# Altium PCB Gain.PcbDoc
Units mm, origin at the board's own origin, x right, y up, seen from the top; angles counter-clockwise.
Board outline 39 x 62.03 mm, 2 copper layers (Top Layer, Bottom Layer); 28 components, 16 nets, 90 pads, 13 vias.
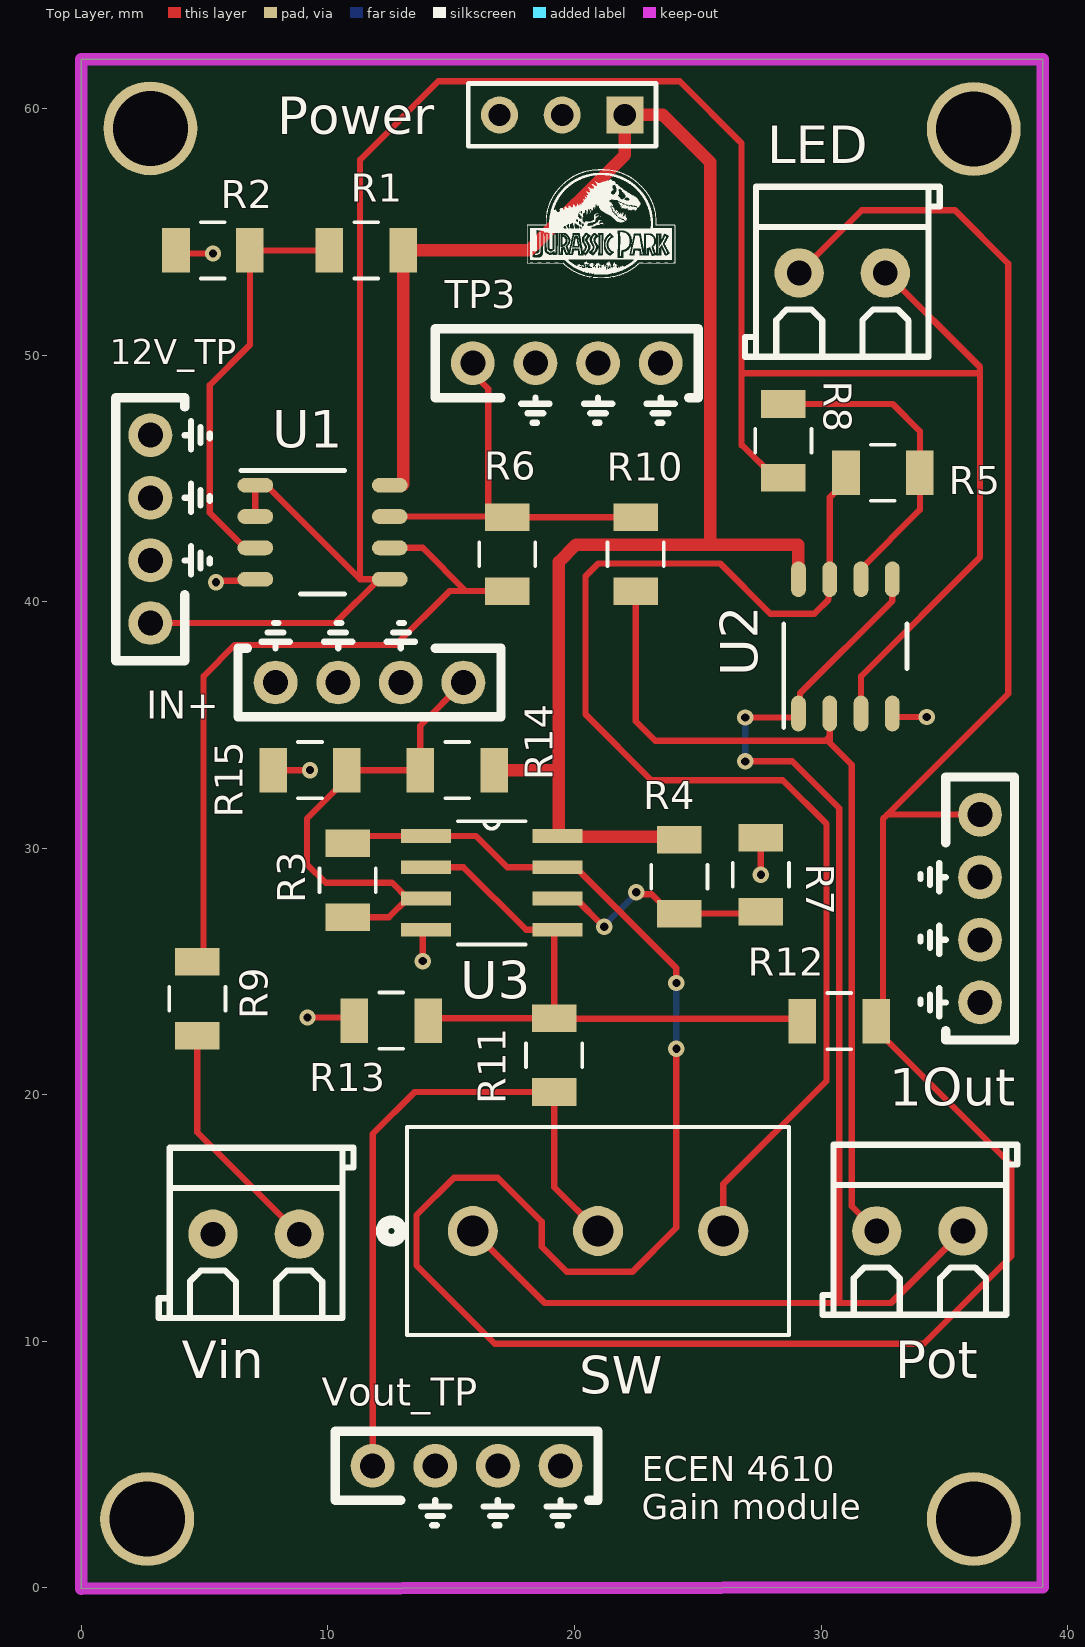
[diagram p0: Top Layer view]
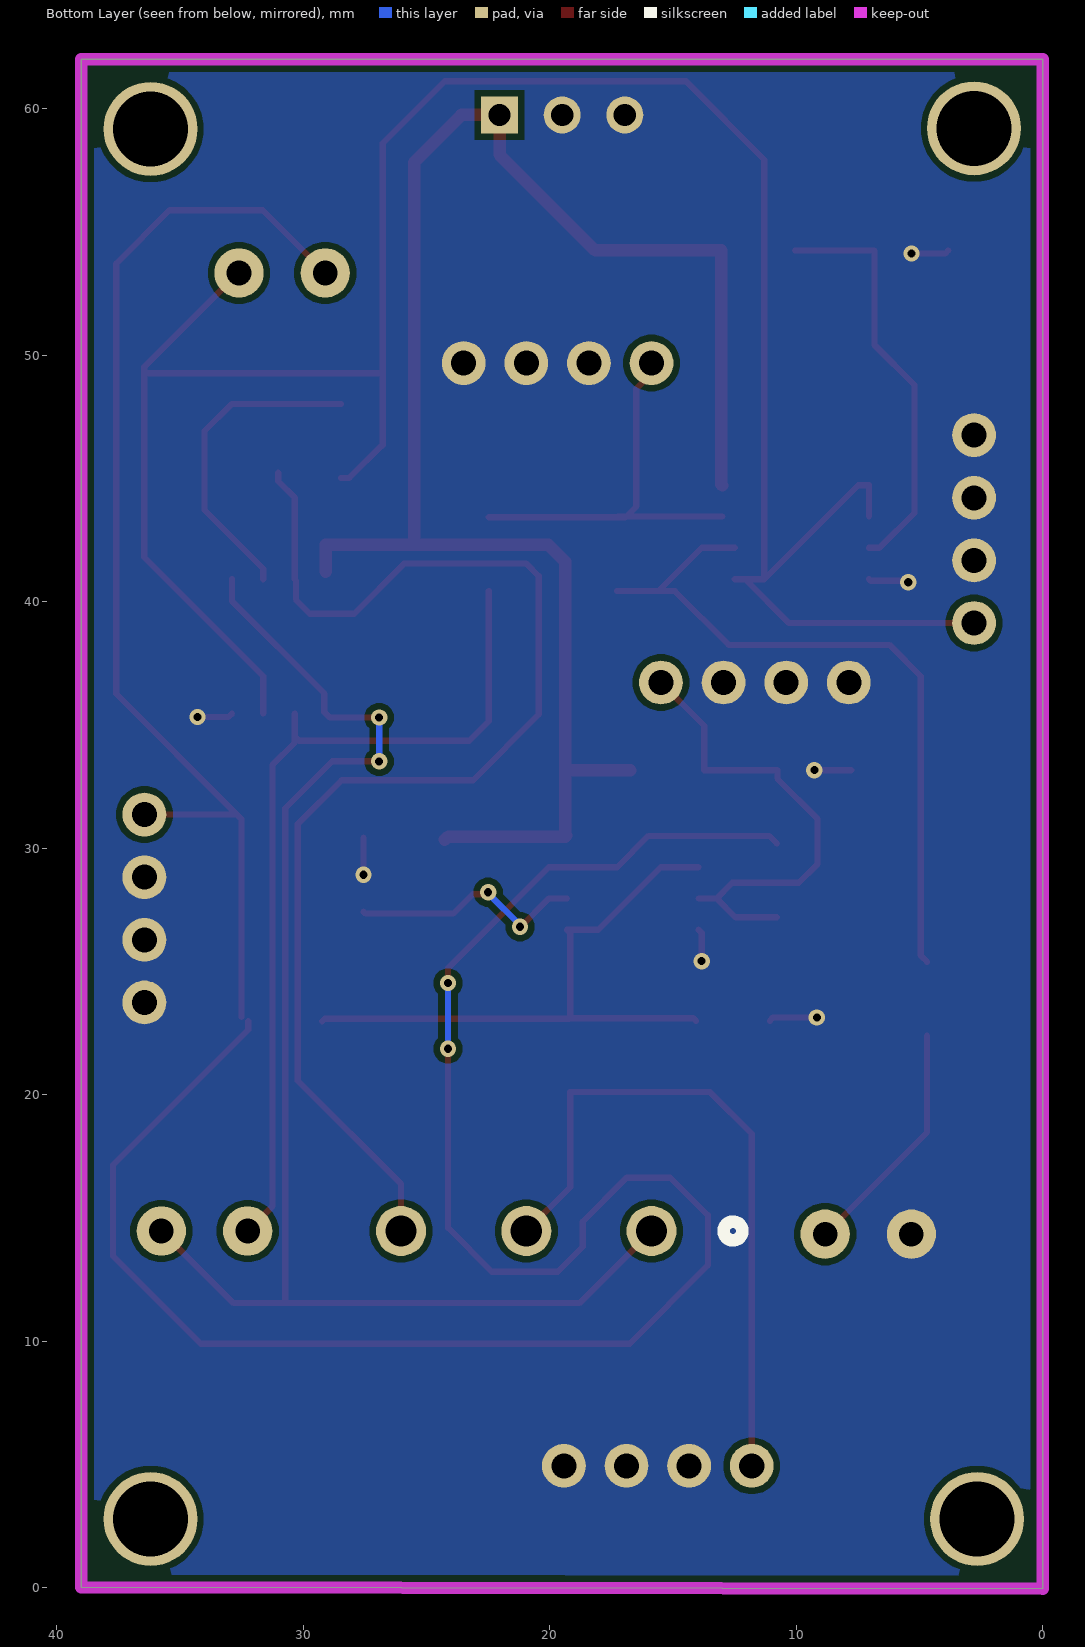
[diagram p1: Bottom Layer view, seen from below]
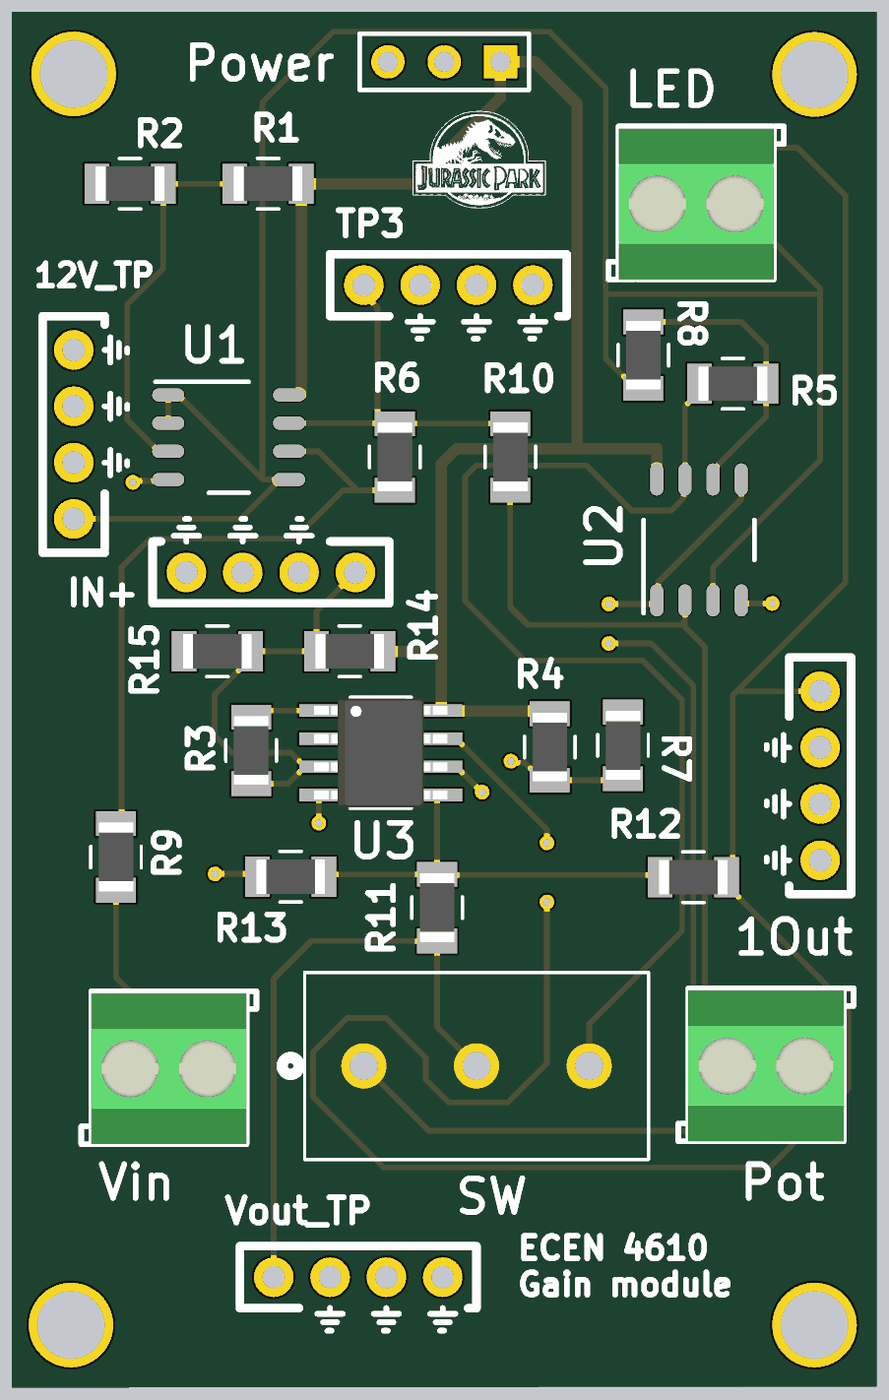
[diagram p2: 3D render of the assembled board from above, using the file's embedded part models]

## Layer stack, top to bottom
Top Solder: solder mask 0.0102, Solder Resist, Dk 3.5
Top Layer: signal copper 0.0356
Dielectric 1: dielectric 0.32, FR-4, Dk 4.8
Bottom Layer: signal copper 0.0356
Bottom Solder: solder mask 0.0102, Solder Resist, Dk 3.5

## Board outline
39,62 39,0.021 0,-0.026 0,62

## Design rules (kind name [scope] priority, off if disabled: settings)
Clearance [All] p1: gap=0.254 ignorepadtopadclearanceinfootprint=FALSE
PlaneConnect [All] p1: planeconnectstyle=Direct reliefexpansion=0.508 reliefentries=4 reliefconductorwidth=0.254 reliefairgap=0.254
PolygonConnect [All] p1: connectstyle=Direct reliefconductorwidth=0.254 reliefentries=4 polygonreliefangle="90 Angle" airgapwidth=0.254
RoutingVias [All] p1: holewidth=0.711 width=1.27 viastyle="Through Hole" minholewidth=0.711 minwidth=1.27 maxholewidth=0.711 maxwidth=1.27
SolderMaskExpansion [All] p1: expansion=0.102 istentingtop=FALSE
SupplyNets "Schematic Supply Nets_2" [InNet('+12')] p1: voltage=0.000
SupplyNets "Schematic Supply Nets_1" [InNet('GND')] p2: voltage=0.000
SupplyNets "Schematic Supply Nets" [InNet('+24')] p3: voltage=0.000
Width [All] p1: maxlimit=0.508 minlimit=0.254 preferedwidth=0.254
29 further rules are at their usual default settings.

## Components (designator, comment, footprint, x,y, rotation, side; value= is the part's Value field where it differs from the comment)
1Out "10x Probe TP" TP10x_Probe 36.449,27.559 r270 top (schematic designator TP4)
12V_TP "10x Probe TP" TP10x_Probe 2.794,42.95 r90 top (schematic designator TP1)
IN+ "10x Probe TP" TP10x_Probe 11.684,36.727 r180 top (schematic designator TP5)
LED "2P Screw Terminal Block" "P_Terminal block 3.5mm-pitch" 30.861,53.34 r0 top (schematic designator P4)
Pot "2P Screw Terminal Block" "P_Terminal block 3.5mm-pitch" 34.008,14.478 r0 top (schematic designator P2)
Power "Header 3" HDR1X3 22.04,59.75 r180 top (schematic designator P3)
R1 "10k" 1206_Passive_Resitor 11.557,54.253 r0 top value=10KOhm
R2 "10k" 1206_Passive_Resitor 5.334,54.253 r0 top value=10KOhm
R3 "300 Ohm" 1206_Passive_Resitor 10.795,28.701 r270 top value=330KOhm
R4 "1k" 1206_Passive_Resitor 24.257,28.853 r90 top value="1M Ohm"
R5 "90KOhm" 1206_Passive_Resitor 32.512,45.236 r180 top
R6 "100KOhm" 1206_Passive_Resitor 17.272,41.934 r90 top
R7 "1k" 1206_Passive_Resitor 27.559,28.931 r270 top value="10K Ohm"
R8 "100KOhm" 1206_Passive_Resitor 28.475,46.525 r90 top
R9 "100KOhm" 1206_Passive_Resitor 4.699,23.9 r90 top
R10 "10k" 1206_Passive_Resitor 22.479,41.934 r90 top value=10KOhm
R11 "1k" 1206_Passive_Resitor 19.177,21.614 r90 top value="1K Ohm"
R12 "300 Ohm" 1206_Passive_Resitor 30.734,22.987 r0 top value=330KOhm
R13 "1k" 1206_Passive_Resitor 12.573,23.011 r0 top value="1K Ohm"
R14 "1k" 1206_Passive_Resitor 15.24,33.171 r0 top value="52K Ohm"
R15 "1k" 1206_Passive_Resitor 9.271,33.171 r0 top value="50K Ohm"
SW "282837-3" 282837-3_TYC 15.875,14.478 r0 top (schematic designator U4)
TP3 "10x Probe TP" TP10x_Probe 19.685,49.681 r0 top
U1 "OPA2196IDR" D0008A_N 9.779,42.823 r0 top
U2 "OPA2196IDR" D0008A_N 30.988,38.193 r90 top
U3 "LM393DR" D8 16.637,28.599 r0 top
Vin "2P Screw Terminal Block" "P_Terminal block 3.5mm-pitch" 7.084,14.351 r0 top (schematic designator P1)
Vout_TP "10x Probe TP" TP10x_Probe 15.621,4.953 r0 top (schematic designator TP2)

## Footprints (in the part's own frame and the unit in brackets; to place one, negate y for a bottom-side part, rotate by r counter-clockwise, add the part's x,y. Pads: shape width x height; smd on the part's side, far side on the other; paste and mask are expansions set on the pad)
1206_Passive_Resitor [mil]
  rect 44x71 smd: 1(-59,0) 2(59,0)
  silkscreen extent -19,-45 19,45, body extent -61,-31 61,31, height 26
282837-3_TYC [mil]
  round 80 / inner round 60 / far side round 80 hole 50 paste-99999 mask+0: 1(0,0) 2(200,0) 3(400,0)
  silkscreen extent -145,-166 505,166
D8 [mil]
  rect 80x22 smd: 1(-105,75) 2(-105,25) 3(-105,-25) 4(-105,-75) 5(105,-75) 6(105,-25) 7(105,25) 8(105,75)
  silkscreen extent -54,-98 54,98, body extent -118,-96 118,96, height 69
D0008A_N [mm]
  oval 1.45x0.6 smd paste+0 mask+0.051: 1(-2.725,1.905) 2(-2.725,0.635) 3(-2.725,-0.635) 4(-2.725,-1.905) 5(2.725,-1.905) 6(2.725,-0.635) 7(2.725,0.635) 8(2.725,1.905)
  silkscreen extent -3.3,-2.5 0.9,2.5
HDR1X3 [mm] "Connector; Header; 3 Position"
  rect 1.5x1.5 hole 0.9: 1(0,0)
  round 1.5 hole 0.9: 2(2.54,0) 3(5.08,0)
  silkscreen extent -1.27,-1.27 6.35,1.27
"P_Terminal block 3.5mm-pitch" [mm]
  round 2 hole 1: 1(-1.75,0) 2(1.75,0)
  silkscreen extent -3.95,-3.4 3.95,3.5, body extent -3.5,-3.4 3.5,3.4, height 8.4
TP10x_Probe [mil] "Small Probs footprint"
  round 70 hole 40: 1(-150,0) 2(-50,0) 2(50,0) 2(150,0)
  silkscreen extent -210,-95 210,55

## Part data
1Out 12V_TP IN+ TP3 Vout_TP: library part TP_10x_Probe, "Test Point 300 mil centers"
LED Pot Vin: library part "P_Terminal block", "Green Straight pin 3.5mm  pitch; P=3.5mm  Screw terminal ROHS", LCSC Part#=C474892, Manufacturer="Cixi Kefa Elec", MFR Part #=KF350-3.5-2P, Datasheet=https://datasheet.lcsc.com/lcsc/2001160007_Cixi-Kefa-Elec-KF350-3-5-2P_C474892.pdf
Power: "Header, 3-Pin", LatestRevisionDate=17-Jul-2002, LatestRevisionNote="Re-released for DXP Platform.", Publisher="Altium Limited"
R1 R2 R10: library part R_10KOhm_1206, "10 kOhms ±5% 0.25W, 1/4W Chip Resistor 1206 (3216 Metric) Automotive AEC-Q200 Thick Film", LCSC Part#=C17902, MFR Part #=RMCF1206FT10K0, Digikey Link=https://www.digikey.com/en/products/detail/stackpole-electronics-inc/RMCF1206FT10K0/1759669, Type=Basic
R3 R12: library part R_300Ohm_1206, "CHIP RESISTOR - SURFACE MOUNT 300OHMS ±1% 1/4W 1206 ROHS", LCSC Part#=C17887, MFR Part #=1206W4F3000T5E, Datasheet=https://datasheet.lcsc.com/szlcsc/Uniroyal-Elec-1206W4F3000T5E_C17887.pdf, Type=Basic
R4 R7 R11 R13 R14 R15: library part R_1K_1206, "CHIP RESISTOR - SURFACE MOUNT 1KOHMS ±1% 1/4W 1206 ROHS", LCSC Part#=C4410, MFR Part #=RNCP1206FTD1K00CT, Digikey Link=https://www.digikey.com/product-detail/en/RNCP1206FTD1K00/RNCP1206FTD1K00CT-ND/2240675/?itemSeq=304982373, Type=Basic
R5 R6 R8 R9: library part R_100KOhm_1206, "100kΩ ±1% 0.25W ±100ppm/℃ 1206 Chip Resistor - Surface Mount RoHS", LCSC Part#=C17900, MFR Part #=1206W4F1003T5E, Datasheet=https://datasheet.lcsc.com/lcsc/1810301421_UNI-ROYAL-Uniroyal-Elec-1206W4F1003T5E_C17900.pdf, Type=Basic
SW: "TERMI-BLOK PCB MOUNT 3P", Manufacturer_Name="TE Connectivity", Copyright="Copyright (C) 2025 Ultra Librarian. All rights reserved.", Manufacturer_Part_Number=282837-3, RefDes=RefDes, Type=Type
U1 U2: "Dual, 36-V, low power, all-purpose amplifier with mux-friendly input 8-SOIC -40 to 125", Manufacturer_Name="Texas Instruments", Copyright="Copyright (C) 2026 Ultra Librarian. All rights reserved.", Datasheet=https://www.ti.com/lit/gpn/opa2196, Manufacturer_Part_Number=OPA2196IDR, RefDes=RefDes, Type=TYPE
U3: "Dual differential comparator, commercial grade 8-SOIC 0 to 70", Manufacturer_Name="Texas Instruments", Copyright="Copyright (C) 2025 Ultra Librarian. All rights reserved.", Manufacturer_Part_Number=LM393DR, RefDes=RefDes, Type=Type

## Free pads (board coordinates)
  round 3.81 hole 3.048: 2(2.667,2.794) 2(2.794,59.206) 2(36.195,2.794) 2(36.195,59.182)

## Via types
v1: diameter 0.66, hole 0.33, Top Layer to Bottom Layer, 13 vias

## Nets (pads, with @x,y where several pads share a name; then routed paths per layer and width w, separated by ;. In a path a pad name is that pad's centre, name@x,y a point inside that pad or via, vN(x,y) a via of type N, cw(c..) or ccw(c..) an arc to the next point about the centre after c; other vN are vias at no path point)
2IN-: R4.1 R7.2 U3.6 | length 9.8
  Top Layer w0.254: U3.6 20.041,27.964 21.184,26.821 v1(21.209,26.821) ; v1(22.504,28.218) 22.582,28.14 23.128,28.14 23.914,27.354 R4.1 27.481,27.354 R7.2
  Bottom Layer w0.254: v1(21.209,26.821) 21.209,26.872 22.504,28.167 v1(22.504,28.218)
+12: 12V_TP.1 LED.2 R8.1 U1.1 U1.2 U1.5 U2.3 | length 98.8
  Top Layer w0.254: 12V_TP.1 10.301,39.14 U1.5@12.079,40.918 ; U1.2 U1.1 7.493,44.728 11.303,40.918 ; U1.5 U1.5@12.079,40.918 ; R8.1 28.132,45.026 26.809,46.35 26.775,46.35 26.775,49.276 ; U2.3 31.623,36.981 36.449,41.807 36.449,49.276 ; LED.2@32.65,53.325 36.449,49.526 36.449,49.276 ; 11.303,40.918 U1.5@12.079,40.918 ; 11.303,40.918 11.303,57.936 14.478,61.111 24.264,61.111 26.775,58.6 26.775,49.276 ; 26.775,49.276 36.449,49.276
+24: Power.1 R1.2 R4.2 R14.2 U1.8 U2.8 U3.8 | length 71.2
  Top Layer w0.508: U1.8@13.013,44.728 13.056,44.77 R1.2 18.161,54.253 22.04,58.132 Power.1 23.586,59.75 25.5,57.836 25.5,42.315 ; R14.2 19.241,33.171 ; R4.2 24.13,30.479 19.367,30.479 19.342,30.504 19.367,30.529 19.367,33.171 19.367,41.617 20.066,42.315 25.5,42.315 ; U2.8@29.083,41.23 29.083,42.315 25.5,42.315
GND: 1Out.2 12V_TP.2 IN+.2 Power.2 Power.3 R2.1 R7.1 R13.1 R15.1 TP3.2 U1.4 U2.4 U3.4 Vin.1 Vout_TP.2 | length 10.9
  Top Layer w0.254: R2.1 3.962,54.126 v1(5.334,54.126) ; v1(5.461,40.791) 5.524,40.855 6.99,40.855 U1.4 ; R15.1 v1(9.271,33.171) ; v1(9.169,23.138) 10.947,23.138 R13.1 ; v1(13.843,25.424) 13.843,26.567 U3.4 ; v1(27.559,28.931) R7.1 ; U2.4 33.031,35.33 v1(34.29,35.33)
IN+: IN+.1 R3.2 R14.1 R15.2 U3.3 | length 19.9
  Top Layer w0.254: R3.2 12.471,27.202 U3.3@13.233,27.964 ; U3.3 U3.3@13.233,27.964 ; IN+.1 13.741,34.974 R14.1 R15.2 10.77,32.828 9.144,31.203 9.144,29.361 9.906,28.599 12.598,28.599 U3.3@13.233,27.964
NetP1_2: R9.1 Vin.2 | length 9.8
  Top Layer w0.254: R9.1 4.699,18.486 Vin.2
NetP2_1: Pot.1 R10.1 U2.2 | length 35.3
  Top Layer w0.254: R10.1 22.479,35.157 23.274,34.362 30.171,34.362 30.353,34.544 ; U2.2 30.353,34.544 ; Pot.1 31.25,15.486 31.25,33.393 30.353,34.29 30.353,34.544
NetP2_2: Pot.2 SW.1 U2.1 U2.5 | length 58
  Top Layer w0.254: SW.1 18.796,11.557 30.734,11.557 ; v1(26.924,33.528) 28.829,33.528 30.734,31.623 30.734,11.557 ; v1(26.924,35.306) 28.923,35.306 29.148,35.53 29.148,36.284 32.893,40.029 U2.5 ; Pot.2 32.837,11.557 30.734,11.557
  Bottom Layer w0.254: v1(26.924,33.528) v1(26.924,35.306)
NetP4_1: 1Out.1 LED.1 R3.1 R12.2 U3.1 U3.7 | length 127.8
  Top Layer w0.254: R3.1 11.1,30.504 U3.1 16.002,30.504 17.272,29.234 U3.7 20.041,29.234 24.13,25.145 v1@24.13,24.511 ; v1@24.13,21.717 24.13,14.605 22.352,12.827 19.685,12.827 18.669,13.843 18.669,14.859 16.891,16.637 15.113,16.637 13.589,15.113 13.589,13.081 16.764,9.906 34.163,9.906 37.719,13.462 37.719,17.158 32.233,22.644 R12.2 ; LED.1 31.651,55.88 35.433,55.88 37.592,53.721 37.592,36.271 32.69,31.369 ; R12.2@32.512,23.159 32.512,31.191 32.69,31.369 ; 1Out.1 32.69,31.369
  Bottom Layer w0.254: v1(24.13,21.868) v1(24.13,24.535)
NetR1_1: R1.1 R2.2 U1.3 | length 17
  Top Layer w0.254: U1.3 6.629,42.188 5.207,43.61 5.207,48.792 6.833,50.418 R2.2 R1.1
NetR5_1: R5.1 R8.2 U2.6 | length 13
  Top Layer w0.254: R8.2 32.901,48.024 34.011,46.914 R5.1 34.011,43.731 31.623,41.343 U2.6
NetR5_2: R5.2 SW.3 U2.7 | length 52.1
  Top Layer w0.254: SW.3 26.035,16.383 30.226,20.574 30.226,30.988 28.448,32.766 23.114,32.766 20.447,35.433 20.447,41.045 20.955,41.553 25.908,41.553 27.94,39.521 29.733,39.521 30.301,40.089 30.301,40.866 U2.7 30.353,44.233 31.013,44.893 R5.2
NetR6_1: R6.1 R9.2 U1.6 | length 29.3
  Top Layer w0.254: R9.2 4.953,25.653 4.953,36.981 6.223,38.251 12.744,38.251 14.929,40.435 R6.1 ; U1.6 13.843,42.188 15.596,40.435
NetR6_2: R6.2 R10.2 TP3.1 U1.7 | length 16.5
  Top Layer w0.254: U1.7@13.012,43.458 17.247,43.458 R6.2 ; TP3.1 15.875,49.269 16.497,48.646 16.497,43.864 16.929,43.433 R6.2 ; R10.2 R6.2
NetR11_2: R11.2 R12.1 R13.2 U3.2 U3.5 | length 25.3
  Top Layer w0.254: U3.2 15.494,29.234 18.034,26.694 U3.5 19.177,26.567 R11.2 ; R13.2 14.173,23.113 R11.2 ; R12.1 29.134,23.089 19.201,23.089 R11.2
Vout: R11.1 SW.2 Vout_TP.1 | length 28
  Top Layer w0.254: Vout_TP.1@11.684,4.953 11.811,5.08 11.811,18.415 13.511,20.115 R11.1 19.177,16.256 SW.2

## Polygon pours and split planes (outlines as drawn)
GND on Bottom Layer "GND_L02_P000" (solid, pour order 0): 0,62 0,-0.026 38.953,-0.026 39,0.021 39,62

## Keep-outs
Keep-Out Layer:
  the board outline again, w0.508

## Silkscreen, mask and mechanical layers (free items; w line width, h text height)
Top Overlay:
  drawing of 54 lines, arcs and shapes, not listed
  text "ECEN 4610 / Gain module" at 22.733,2.794 h1.02